# Altium PCB PCBV_DIY.PcbDoc
Units mm, origin at the board's own origin, x right, y up, seen from the top; angles counter-clockwise.
Board outline 30 x 30 mm, 2 copper layers (Top Layer, Bottom Layer); 33 components, 31 nets, 124 pads, 15 vias.
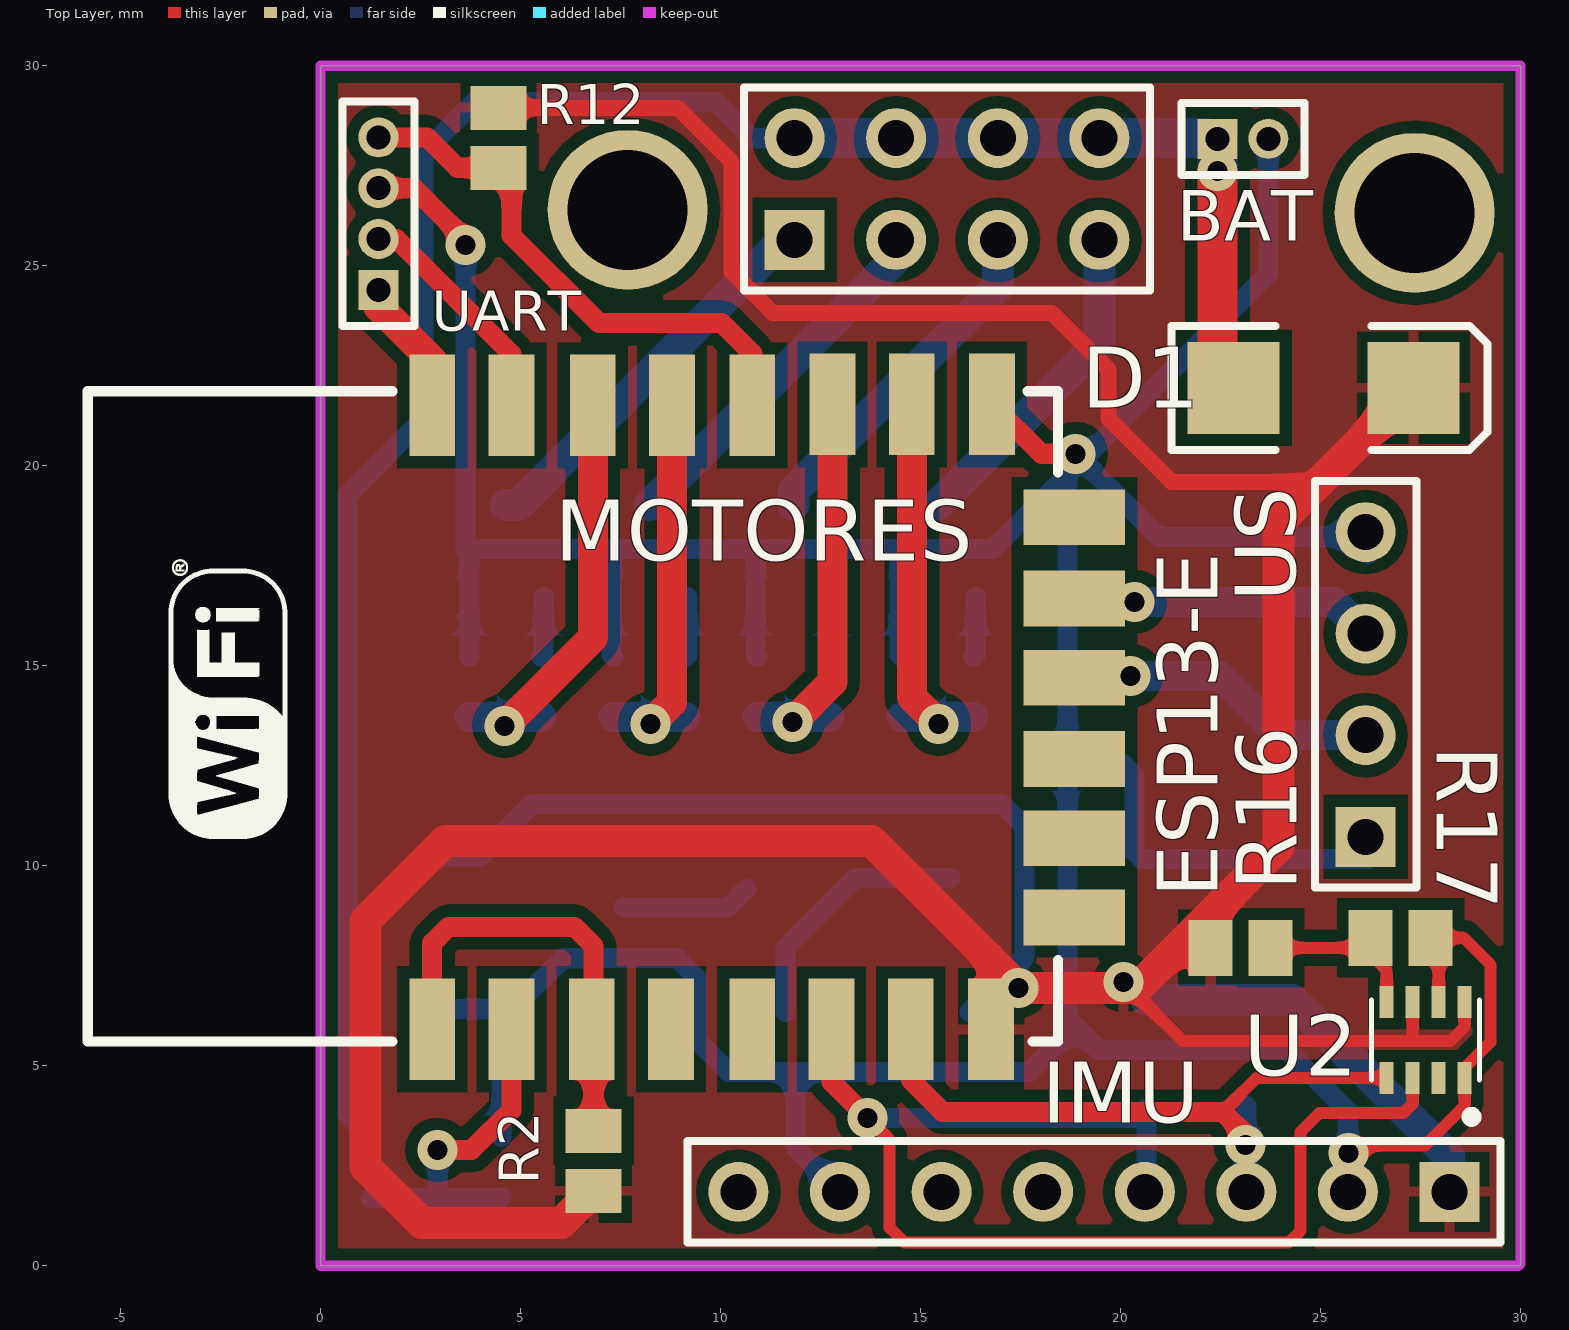
[diagram p0: Top Layer view]
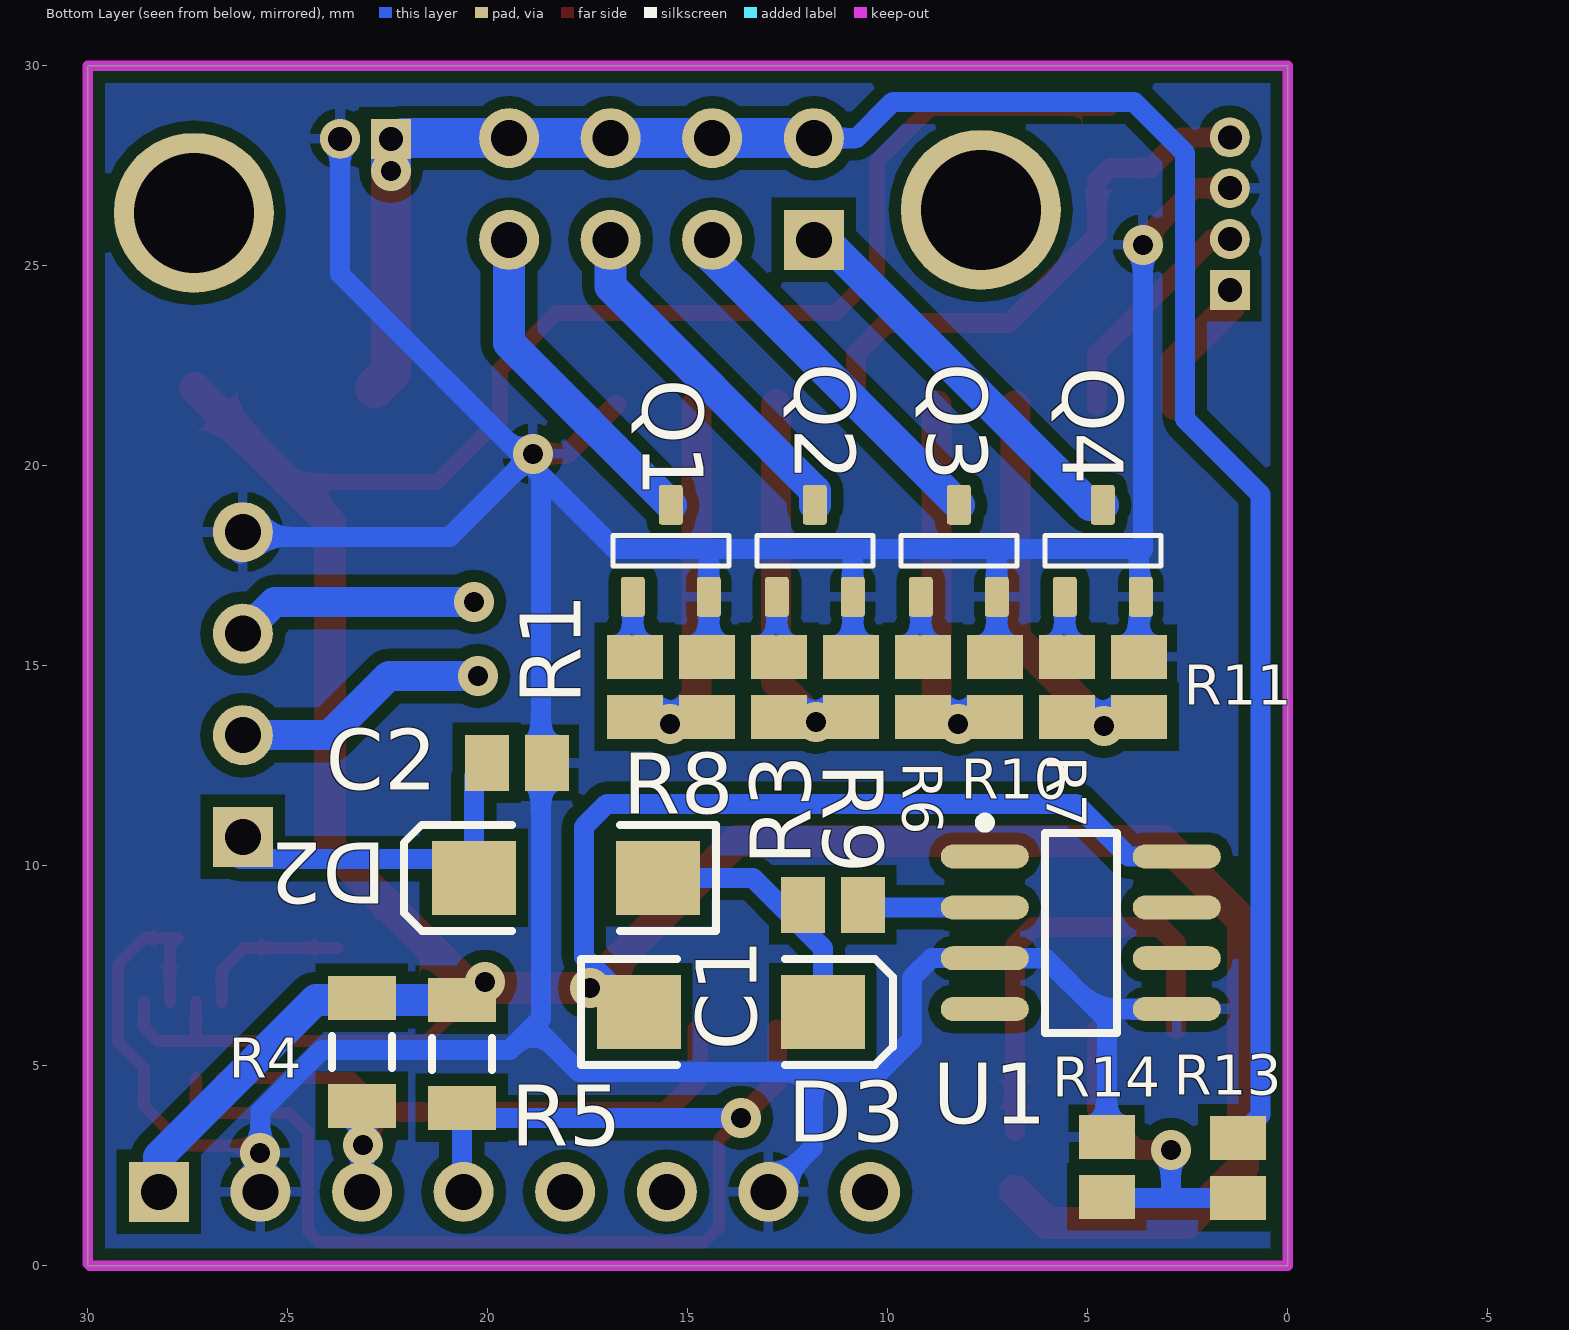
[diagram p1: Bottom Layer view, seen from below]

## Layer stack, top to bottom
Top Solder: solder mask 0.0102, Solder Resist, Dk 3.5
Top Layer: signal copper 0.0356
Dielectric 1: dielectric 0.32, FR-4, Dk 4.8
Bottom Layer: signal copper 0.0356
Bottom Solder: solder mask 0.0102, Solder Resist, Dk 3.5

## Board outline
0,0 30,0 30,30 0,30

## Design rules (kind name [scope] priority, off if disabled: settings)
Clearance [All] p1: gap=0.3 except(0.256: Arc-THPad Track-THPad SMDPad-THPad THPad-THPad)
PolygonConnect [All] p1: connectstyle=Relief reliefconductorwidth=0.254 reliefentries=4 polygonreliefangle="90 Angle" airgapwidth=0.254
RoutingVias [All] p1: holewidth=0.711 width=1.27 viastyle="Through Hole" minholewidth=0.711 minwidth=1.27 maxholewidth=0.711 maxwidth=1.27
SolderMaskExpansion [All] p1: expansion=0.102
Width [All] p1: maxlimit=2 minlimit=0.256 preferedwidth=0.5
30 further rules are at their usual default settings.

## Components (designator, comment, footprint, x,y, rotation, side; value= is the part's Value field where it differs from the comment)
BAT "Header 2" MHDR1X2 22.425,28.175 r0 top (schematic designator P1)
C1 "Cap" C0805 11.375,9.025 r0 bottom
C2 "Cap" C0805 19.275,12.575 r0 bottom
D1 "Diode 1N5402" DSO-C2/X2.3 25.075,21.95 r0 top
D2 "Diode 1N5402" DSO-C2/Z6.7 18.05,9.7 r0 bottom
D3 "Diode 1N5402" DSO-C2/Z6.7 13.925,6.35 r180 bottom
ESP13-E "ESP8266 ESP-12-E" "ESP8266 ESP-12-E B" 19.2,22.5 r90 top (schematic designator IC1)
IMU "Header 8" HDR1X8 28.225,1.85 r180 top (schematic designator P5)
MOTORES "Header 4X2" HDR2X4 11.85,25.65 r0 top
Q1 "MOSFET-N" SOT23-3 15.425,17.875 r90 bottom
Q2 "MOSFET-N" SOT23-3 11.825,17.875 r90 bottom
Q3 "MOSFET-N" SOT23-3 8.225,17.875 r90 bottom
Q4 "MOSFET-N" SOT23-3 4.625,17.875 r90 bottom
R1 "Res3" C0805 16.325,14.475 r90 bottom
R2 "Res3" C0805 6.825,2.625 r90 top
R3 "Res3" C0805 12.725,14.475 r90 bottom
R4 "Res3" C1206 23.15,5.35 r90 bottom
R5 "Res3" C1206 20.65,5.3 r90 bottom
R6 "Res3" C0805 9.125,14.475 r90 bottom
R7 "Res3" C0805 5.525,14.475 r90 bottom
R8 "Res3" C0805 14.525,14.475 r90 bottom
R9 "Res3" C0805 10.925,14.475 r90 bottom
R10 "Res3" C0805 7.325,14.475 r90 bottom
R11 "Res3" C0805 3.725,14.475 r90 bottom
R12 "Res3" C0805 4.45,28.2 r270 top
R13 "Res3" C0805 1.25,2.45 r270 bottom
R14 "Res3" C0805 4.525,2.475 r90 bottom
R16 "Res3" C0805 23,7.95 r180 top
R17 "Res3" C0805 27,8.2 r0 top
U1 "LMC7660IM" M08A_N 5.175,8.325 r180 bottom
U2 "BMP280" LGA-8_BMP280(Primary) 27.625,5.65 r270 top
UART "MHDR1X4" MHDR1X4 1.45,24.4 r90 top (schematic designator P2)
US "Header 4" HDR1X4 26.125,10.725 r90 top (schematic designator P4)

## Footprints (in the part's own frame and the unit in brackets; to place one, negate y for a bottom-side part, rotate by r counter-clockwise, add the part's x,y. Pads: shape width x height; smd on the part's side, far side on the other; paste and mask are expansions set on the pad)
C0805 [mm] "Chip Capacitor, Body 2.0x1.3mm, IPC High Density"
  rect 1.1x1.4 smd: 1(-0.75,0) 2(0.75,0)
  body extent -1.1,-0.72 1.1,0.72, height 1.4
C1206 [mm] "Chip Capacitor, Body 3.2x1.6mm, IPC High Density"
  rect 1.1x1.7 smd: 1(-1.35,0) 2(1.35,0)
  silkscreen extent -0.4,-0.75 0.4,0.75, body extent -1.7,-0.9 1.7,0.9, height 1.3
DSO-C2/X2.3 [mm] "DO-214-AA/SMB; 2 C-Bend Leads; Body 5.3 x 3.6 mm, inc. leads (LxW)"
  rect 2.3x2.3 smd: 1(-2.25,0) 2(2.25,0)
  silkscreen extent -3.8,-1.55 4.1,1.55
DSO-C2/Z6.7 [mm] "DO-214-AC/SMA; 2 C-Bend Leads; Body 5.3 x 2.6 mm, inc. leads (LxW)"
  rect 2.1x1.85 smd: 1(-2.3,0) 2(2.3,0)
  silkscreen extent -3.75,-1.33 4.05,1.33
"ESP8266 ESP-12-E B" [mil] "ESP8266 ESP-12-E"
  rect 100x45 smd: 1(-653,646) 2(-653,568) 3(-653,489) 4(-653,411) 5(-653,331) 6(-653,253) 7(-653,175) 8(-653,96) 15(-38,95) 16(-38,174) 17(-38,252) 18(-39,331) 19(-39,410) 20(-39,488) 21(-39,568) 22(-39,646)
  rect 55x100 smd: 9(-543,14) 10(-465,14) 11(-387,14) 12(-307,14) 13(-229,14) 14(-149,14)
  silkscreen extent -665,30 -25,985
HDR1X4 [mm] "Connector; Header; 4 Position"
  rect 1.5x1.5 hole 0.9: 1(0,0)
  round 1.5 hole 0.9: 2(2.54,0) 3(5.08,0) 4(7.62,0)
  silkscreen extent -1.27,-1.27 8.89,1.27
HDR1X8 [mm] "Connector; Header; 8 Position"
  rect 1.5x1.5 hole 0.9: 1(0,0)
  round 1.5 hole 0.9: 2(2.54,0) 3(5.08,0) 4(7.62,0) 5(10.16,0) 6(12.7,0) 7(15.24,0) 8(17.78,0)
  silkscreen extent -1.27,-1.27 19.05,1.27
HDR2X4 [mm] "Connector; Header; 4x2 Position"
  rect 1.5x1.5 hole 0.9: 1(0,0)
  round 1.5 hole 0.9: 2(0,2.54) 3(2.54,0) 4(2.54,2.54) 5(5.08,0) 6(5.08,2.54) 7(7.62,0) 8(7.62,2.54)
  silkscreen extent -1.27,-1.27 8.89,3.81
LGA-8_BMP280(Primary) [mm]
  rect 0.8x0.35 smd paste-25.4 mask-25.4: 1(0.95,0.975) 2(0.95,0.325) 3(0.95,-0.325) 4(0.95,-0.975) 5(-0.95,-0.975) 6(-0.95,-0.325) 7(-0.95,0.325) 8(-0.95,0.975)
  silkscreen extent -1,-1.35 2.02,1.35
M08A_N [mm] "SOIC, 8-Leads, Body 4.9x3.9mm, Pitch 1.27mm, IPC Medium Density"
  oval 2.2x0.6 smd: 1(-2.4,1.905) 2(-2.4,0.635) 3(-2.4,-0.635) 4(-2.4,-1.905) 5(2.4,-1.905) 6(2.4,-0.635) 7(2.4,0.635) 8(2.4,1.905)
  silkscreen extent -2.53,-2.5 0.9,2.88, body extent -2,-2.5 2,2.5, height 1.75
MHDR1X2 [mm] "Connector; Header; 2 Position"
  rect 1x1 hole 0.6: 1(0,0)
  round 1 hole 0.6: 2(1.27,0)
  silkscreen extent -0.9,-0.9 2.17,0.9
MHDR1X4 [mm] "Connector; Header; 4 Position"
  rect 1x1 hole 0.6: 1(0,0)
  round 1 hole 0.6: 2(1.27,0) 3(2.54,0) 4(3.81,0)
  silkscreen extent -0.9,-0.9 4.71,0.9
SOT23-3 [mm] "SOT23, 3 pin"
  round 0.5 on Mech15: 0(0,0)
  rrect25% 1x0.6 smd: 1(-1.15,0.95) 2(-1.15,-0.95) 3(1.15,0)
  silkscreen extent -0.38,-1.45 0.38,1.45, body extent -1.4,-1.45 1.4,1.45, height 1.29

## Part data
BAT: "Header, 2-Pin"
C1 C2: "Capacitor"
D1 D2 D3: "3 Amp General Purpose Rectifier"
IMU: "Header, 8-Pin"
MOTORES: "Header, 4-Pin, Dual row"
Q1 Q2 Q3 Q4: "N-Channel MOSFET"
R1 R2 R3 R4 R5 R6 R7 R8 R9 R10 R11 R12 R13 R14 R16 R17: "Resistor"
U1: "Switched Capacitor Voltage Converter, 8-pin Narrow SOIC"
U2: "Barometro"
UART US: "Header, 4-Pin"

## Free pads (board coordinates)
  round 4 hole 3: 2(27.35,26.325) 3(7.675,26.4)

## Via types
v1: diameter 1, hole 0.5, Top Layer to Bottom Layer, 15 vias

## Nets (pads, with @x,y where several pads share a name; then routed paths per layer and width w, separated by ;. In a path a pad name is that pad's centre, name@x,y a point inside that pad or via, vN(x,y) a via of type N, cw(c..) or ccw(c..) an arc to the next point about the centre after c; other vN are vias at no path point)
5VCC: C2.2 D2.2 US.1 | length 8.3
  Bottom Layer w0.5: C2.2 20.35,12.25 20.35,10.35 20.525,10.175 US.1@26.2,10.175
ADC: ESP13-E.2 R13.2 R14.1 | length 8.8
  Top Layer w0.5: v1(2.925,2.9) 3.775,2.9 4.773,3.898 ESP13-E.2
  Bottom Layer w0.5: R13.2 2.95,1.7 ; v1(2.925,2.9) 2.925,1.725 2.95,1.7 ; R14.1 4.5,1.7 2.95,1.7
BOOT: ESP13-E.18 R12.2 UART.4 | length 13.7
  Top Layer w0.5: UART.4 2.665,28.21 3.425,27.45 R12.2 4.775,27.125 4.775,25.756 6.956,23.575 10.025,23.575 10.793,22.807 ESP13-E.18
ECHO: ESP13-E.13 US.3 | length 6.1
  Bottom Layer w0.75: v1(20.35,16.6) 25.33,16.6 US.3
GND: BAT.2 C2.1 ESP13-E.15 IMU.2 IMU.7 Q1.2 Q2.2 Q3.2 Q4.2 R8.2 R9.2 R10.2 R11.2 R14.2 R17.2 U1.3 U1.5 U2.1 U2.7 UART.3 US.4 | length 118.7
  Top Layer w0.3: v1(25.7,2.825) 25.881,3.006 27.606,3.006 28.6,4 U2.1 28.6,4.95 29.25,5.6 29.25,7.525 28.575,8.2 R17.2 27.95,8 U2.7
  Top Layer w0.5: UART.3 2.335,26.94 3.625,25.65 v1(3.625,25.525) ; ESP13-E.15 18.022,20.3 v1(18.875,20.3)
  Bottom Layer w0.5: U1.5 4.795,6.42 ; v1(3.625,25.525) 3.625,17.9 3.725,17.8 ; R11.2 3.725,17.8 ; R14.2 4.525,6.15 4.795,6.42 ; 7.25,17.9 7.275,17.875 Q3.2 7.275,15.275 R10.2 ; 10.825,17.9 10.875,17.85 Q2.2 10.875,15.275 R9.2 ; IMU.7 11.875,2.96 11.875,4.85 ; R8.2 14.475,15.275 Q1.2 14.475,17.9 14.45,17.925 ; v1(18.875,20.3) 19.038,20.138 20.95,18.225 25.77,18.225 US.4@26.2,17.795 ; BAT.2 23.695,24.795 18.6,19.7 ; IMU.2 25.685,3.865 24.15,5.4 19.45,5.4 18.863,5.987 ; 3.725,17.8 3.85,17.925 14.45,17.925 ; 4.795,6.42 6.065,7.69 U1.3 8.91,7.69 9.4,7.2 9.4,5.65 10.2,4.85 11.875,4.85 ; 11.875,4.85 17.725,4.85 18.863,5.987 ; 14.45,17.925 16.825,17.925 18.6,19.7 ; 18.6,19.7 18.675,19.625 18.675,6.175 18.863,5.987
GPIO_1: ESP13-E.9
GPIO_2: ESP13-E.10
GPIO_3: ESP13-E.11
I2C_SCL: ESP13-E.7 IMU.3 R4.1 U2.4 | length 16.8
  Top Layer w0.3: 22.55,3.85 23.4,4.7 U2.4
  Top Layer w0.5: ESP13-E.7 14.755,4.645 15.55,3.85 22.55,3.85 v1@23.145,3.255
  Bottom Layer w0.5: IMU.3 23.145,3.995 R4.1
  other v1: 23.125,3.025
I2C_SDA: ESP13-E.6 IMU.4 R5.1 U2.3 | length 31.5
  Top Layer w0.3: v1(13.675,3.7) 14.225,3.15 14.225,0.95 14.597,0.578 24.203,0.578 24.5,0.875 24.5,3.35 24.975,3.825 27.075,3.825 27.3,4.05 U2.3
  Top Layer w0.5: ESP13-E.6 12.774,4.601 v1(13.675,3.7)
  Bottom Layer w0.5: v1(13.675,3.7) 20.4,3.7 R5.1 20.65,1.895 IMU.4
NetC1_1: C1.1 U1.2 | length 3.3
  Bottom Layer w0.5: U1.2 10.185,8.96 C1.1@10.65,9.425
NetC1_2: C1.2 D2.1 D3.2 | length 6.4
  Bottom Layer w0.5: D3.2 11.625,7.95 13.375,9.7 D2.1
NetESP13-E_1: ESP13-E.1 ESP13-E.3 R2.2 | length 11.2
  Top Layer w0.5: ESP13-E.1 2.792,8.067 3.2,8.475 6.35,8.475 6.825,8 R2.2
NetMOTORES_1: MOTORES.1 Q4.3 | length 10
  Bottom Layer w0.8: Q4.3 4.95,19.025 11.575,25.65 MOTORES.1
NetMOTORES_3: MOTORES.3 Q3.3 | length 9.2
  Bottom Layer w0.8: Q3.3 14.39,25.19 MOTORES.3
NetMOTORES_5: MOTORES.5 Q2.3 | length 8.7
  Bottom Layer w0.8: Q2.3 11.825,19.375 16.93,24.48 MOTORES.5
NetMOTORES_7: MOTORES.7 Q1.3 | length 8.3
  Bottom Layer w0.8: Q1.3 19.47,23.07 MOTORES.7
NetQ1_2: Q1.1 R1.2 | length 1.5
  Bottom Layer w0.5: R1.2 16.375,15.275 Q1.1
NetQ2_2: Q2.1 R3.2 | length 1.5
  Bottom Layer w0.5: R3.2 12.775,15.275 Q2.1
NetQ3_2: Q3.1 R6.2 | length 1.5
  Bottom Layer w0.5: R6.2 9.175,15.275 Q3.1
NetQ4_2: Q4.1 R7.2 | length 1.5
  Bottom Layer w0.5: R7.2 5.575,15.275 Q4.1
NetR16_1: R16.1 R17.1 U2.5 | length 3.9
  Top Layer w0.3: R16.1 26.1,7.95 26.65,7.4 U2.5
PWM0: ESP13-E.16 R1.1 R8.1 | length 10.1
  Top Layer w0.75: ESP13-E.16 14.78,14.22 v1(15.45,13.55)
  Bottom Layer w0.75: R8.1 R1.1
PWM1: ESP13-E.17 R3.1 R9.1 | length 10.1
  Top Layer w0.75: v1(11.8,13.6) 12.799,14.599 ESP13-E.17
  Bottom Layer w0.75: R9.1 R3.1
PWM2: ESP13-E.19 R6.1 R10.1 | length 10
  Top Layer w0.75: v1(8.25,13.55) 8.786,14.086 ESP13-E.19
  Bottom Layer w0.75: R10.1 R6.1
PWM3: ESP13-E.20 R7.1 R11.1 | length 10.7
  Top Layer w0.75: v1(4.6,13.5) 6.805,15.705 ESP13-E.20
  Bottom Layer w0.75: R11.1 R7.1
RX: ESP13-E.21 UART.2 | length 5.8
  Top Layer w0.5: UART.2 1.896,25.67 4.773,22.793 ESP13-E.21
TRIGER: ESP13-E.12 US.2 | length 6.5
  Bottom Layer w0.75: v1(20.25,14.75) 22.475,14.75 23.96,13.265 US.2
TX: ESP13-E.22 UART.1 | length 3.4
  Top Layer w0.75: UART.1 1.45,23.975 2.792,22.633 ESP13-E.22
VCC: D1.2 D3.1 ESP13-E.8 IMU.1 R2.1 R4.2 R5.2 R12.1 R16.2 U1.8 U2.6 U2.8 | length 120.8
  Top Layer w0.3: v1(20.075,7.1) 20.225,6.95 21.55,5.625 27.275,5.625 ; U2.6 27.3,5.65 27.275,5.625 ; U2.8 28.6,5.975 28.25,5.625 27.275,5.625
  Top Layer w0.4: R12.1 8.925,28.95 10.275,27.6 10.275,24.85 11.3,23.825 18.275,23.825 19.7,22.4 19.7,21.175 21.275,19.6 24.975,19.6
  Top Layer w0.8: R2.1 6.025,1.075 2.525,1.075 1.125,2.475 1.125,8.625 3.125,10.625 13.775,10.625 v1(17.45,6.95) 20.225,6.95 20.425,6.95 23.95,10.475 23.95,18.575 24.975,19.6 D1.2
  Bottom Layer w0.5: U1.8 3.98,10.23 5.3,11.55 17.025,11.55 17.6,10.975 17.6,7.725 D3.1
  Bottom Layer w0.8: R5.2 24.3,6.65 28.225,2.725 IMU.1
VCC_BAT: BAT.1 D1.1 MOTORES.2 MOTORES.4 MOTORES.6 MOTORES.8 R13.1 | length 52.5
  Top Layer w1: v1(22.425,27.375) 22.425,22.35 D1.1
  Bottom Layer w0.5: R13.1 0.678,3.772 0.678,19.278 2.575,21.175 2.575,27.825 3.85,29.1 9.875,29.1 10.785,28.19 MOTORES.2
  Bottom Layer w1: MOTORES.2 11.86,28.2 BAT.1@22.125,28.2 ; v1(22.425,27.375) BAT.1
pads on no net: ESP13-E.4 ESP13-E.5 ESP13-E.14 IMU.5 IMU.6 IMU.8 Q1.0 Q2.0 Q3.0 Q4.0 U1.1 U1.4 U1.6 U1.7 U2.2

## Polygon pours and split planes (outlines as drawn)
GND on Bottom Layer "Plano_GND" (solid, pour order 2): 0,30 30,30 30,0.05 29.95,0 0,0
VCC on Top Layer "Plano_VCC" (solid, pour order 4): 0,30 30,30 30,0.05 0.05,0.05 0,0

## Keep-outs
Keep-Out Layer:
  lines w0.256: 0,0 29.95,0 30,0.05 30,30 25,30 0,30 0,0

## Text inside footprints (layer, text, board x,y; h text height)
ESP13-E: Mechanical 13 "ANTENNA AREA" at -5.199,5.915 h0.25 r90; Mechanical 13 "CUTOUT POLYGON" at -4.691,5.915 h0.25 r90